# Altium PCB IR2104(7).PcbDoc
Units mm, origin at the board's own origin, x right, y up, seen from the top; angles counter-clockwise.
Board outline 152.4 x 101.6 mm, 2 copper layers (Top Layer, Bottom Layer); 28 components, 22 nets, 88 pads, 42 vias.
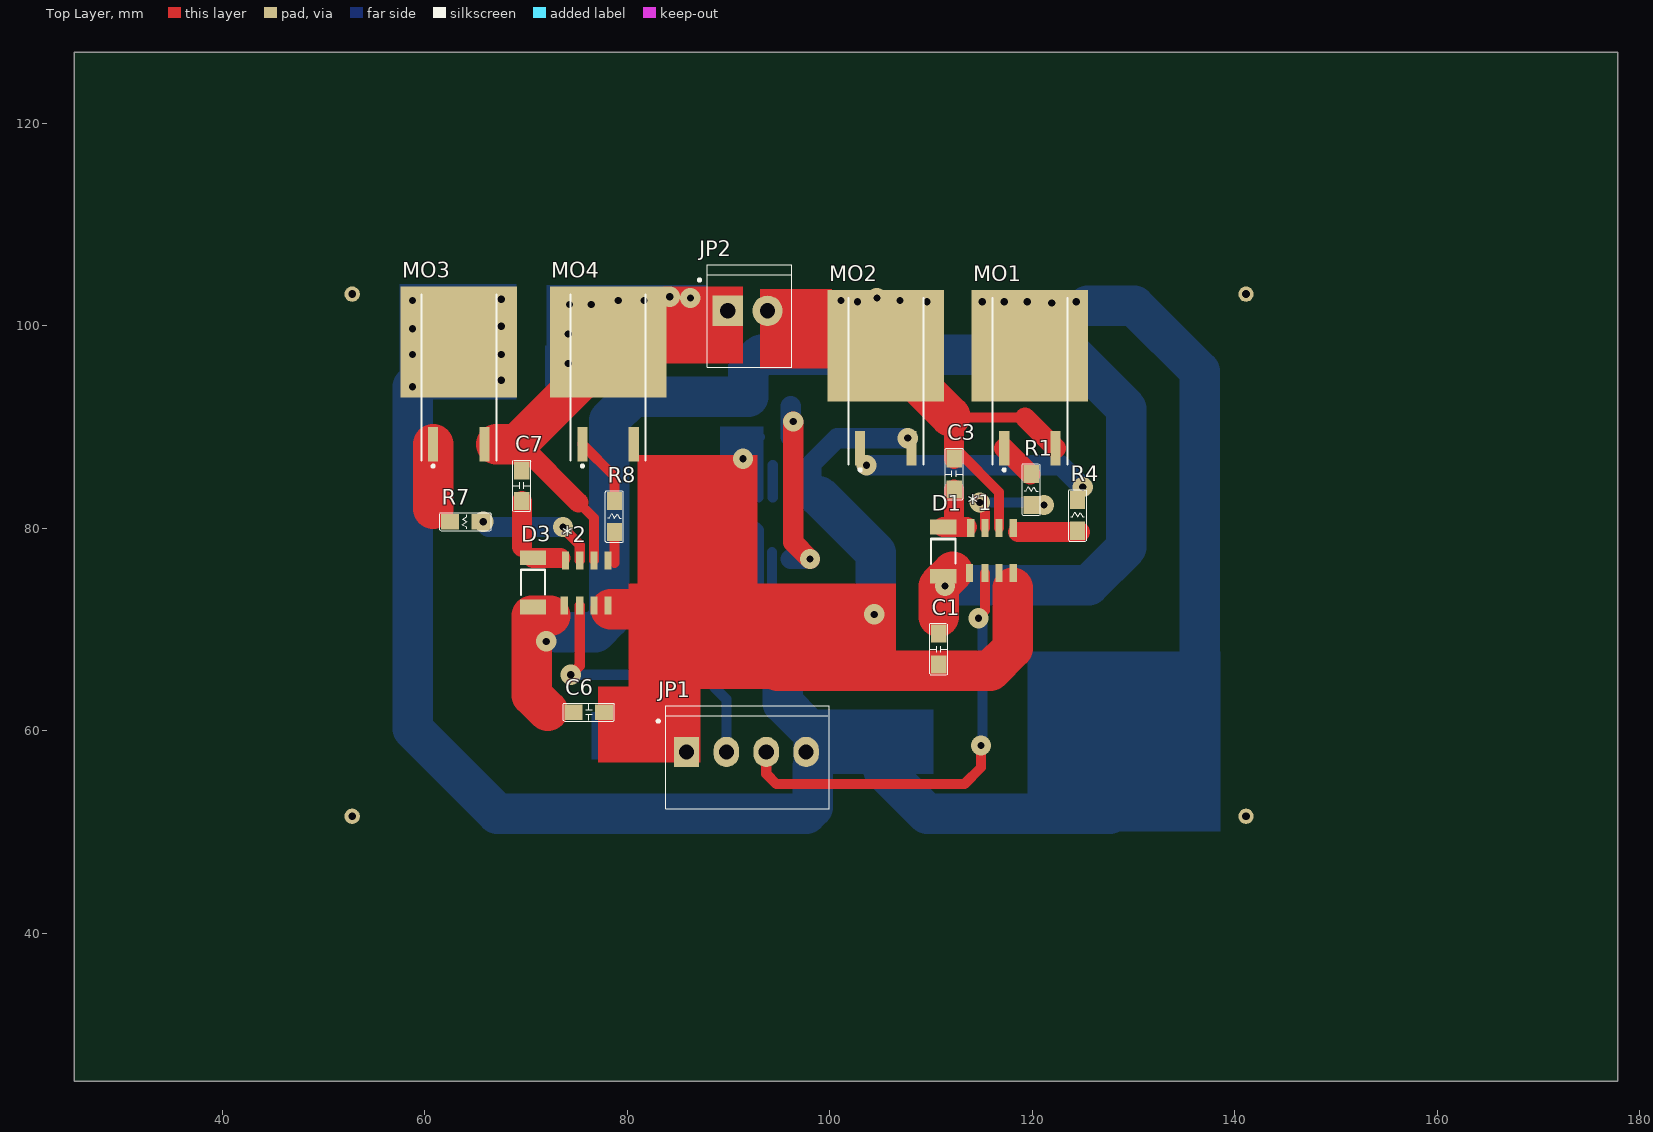
[diagram p0: Top Layer view]
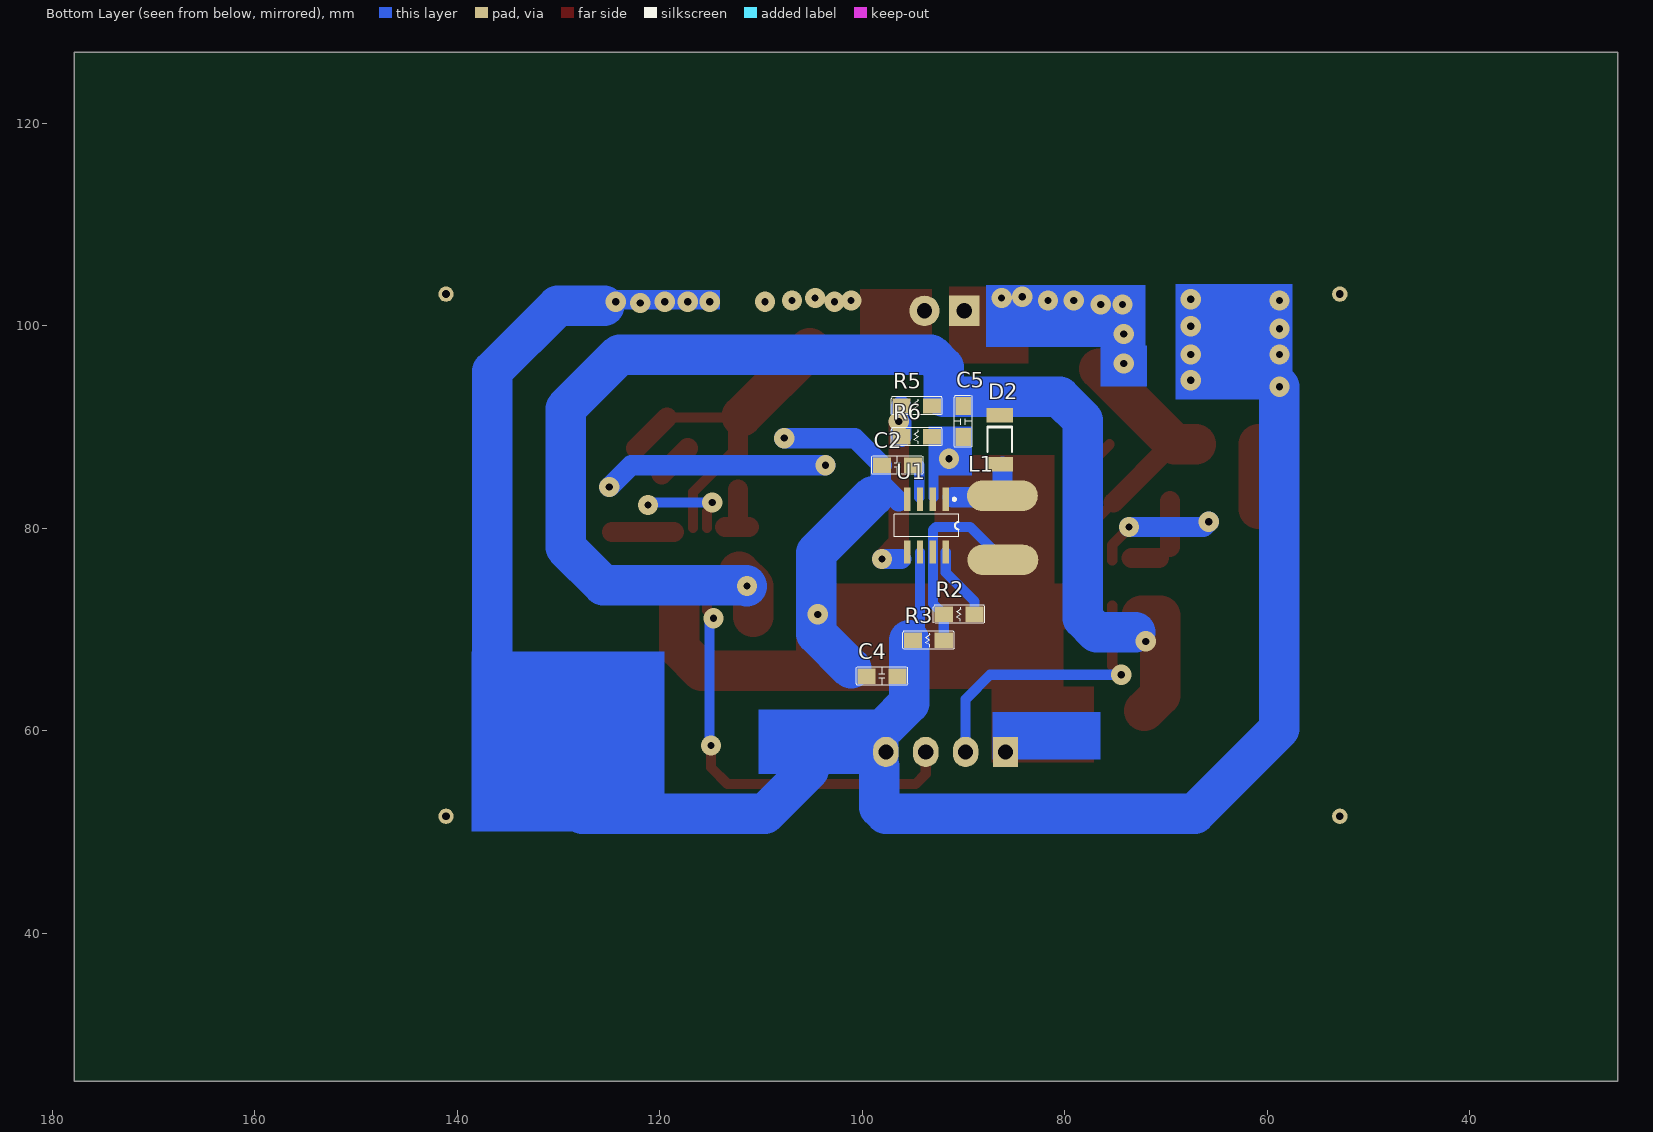
[diagram p1: Bottom Layer view, seen from below]

## Layer stack, top to bottom
Top Layer: signal copper 0.0356
Dielectric: dielectric 0.32, FR-4, Dk 4.8
Bottom Layer: signal copper 0.0356

## Board outline
25.4,25.4 177.8,25.4 177.8,127 25.4,127

## Design rules (kind name [scope] priority, off if disabled: settings)
Clearance [All] p1: gap=0.254
PolygonConnect [All] p1: connectstyle=Relief reliefconductorwidth=0.254 reliefentries=4 polygonreliefangle="90 Angle"
RoutingVias [All] p1: holewidth=0.711 width=1.27 viastyle="Through Hole" minholewidth=0.711 minwidth=1.27 maxholewidth=0.711 maxwidth=1.27
ShortCircuit [All] p1 off: allowed=FALSE
SilkToSilkClearance [All] p1 off: silktosilkclearance=0.254
SilkscreenOverComponentPads [All] p1 off: minsilkscreentomaskgap=0.254
SolderMaskExpansion [All] p1: expansion=0.102
TestPointUsage [All] p1: valid=0 allowmultiple=FALSE
Testpoint [All] p1: side=15 testpointundercomponent=TRUE minsize=1.016 maxsize=2.54 preferedsize=1.524 minholesize=0 maxholesize=1.016 preferedholesize=0.813 testpointgrid=0.025 style=1023 order=0-112345678
Width [All] p1: maxlimit=4 minlimit=1 preferedwidth=2
21 further rules are at their usual default settings.

## Components (designator, comment, footprint, x,y, rotation, side; value= is the part's Value field where it differs from the comment)
*1 "IR2103" IR2104S 117.348,77.851 r0 top
*2 "IR2103" IR2104S 77.343,74.676 r0 top
C1 "CAP_1" CC1005-0402 110.744,66.548 r90 top
C2 "CAP_1" CC1005-0402 98.044,86.233 r180 bottom
C3 "CAP_1" CC1005-0402 112.268,86.868 r270 top
C4 "CAP_1" CC1005-0402 99.568,65.405 r180 bottom
C5 "CAP_1" CC1005-0402 90.043,89.027 r90 bottom
C6 "CAP_1" CC1005-0402 77.724,61.849 r180 top
C7 "CAP_1" CC1005-0402 69.596,85.725 r270 top
D1 "DIODE" "diode stan" 111.252,77.724 r90 top
D2 "DIODE" "diode stan" 86.36,88.773 r90 bottom
D3 "DIODE" "diode stan" 70.739,74.676 r90 top
JP1 "H-4" "H-4/4 -T" 85.852,57.912 r90 top
JP2 "H-2" H-2/2-T 89.916,101.473 r90 top
L1 "10mH" 贴片电感 82.804,84.201 r0 bottom
MO1 "IRF2804" TS-005 119.888,98.044 r0 top
MO2 "IRF2804" TS-005 105.664,98.044 r0 top
MO3 "IRF2804" TS-005 63.5,98.425 r0 top
MO4 "IRF2804" TS-005 78.232,98.425 r0 top
R1 "Res" R2012-0805 119.888,82.296 r90 top
R2 "Res" R2012-0805 88.9,71.501 r0 bottom
R3 "Res" R2012-0805 91.948,68.961 r0 bottom
R4 "Res" R2012-0805 124.46,79.756 r90 top
R5 "Res" R2012-0805 93.091,92.075 r0 bottom
R6 "Res" R2012-0805 93.091,89.027 r0 bottom
R7 "Res" R2012-0805 65.532,80.645 r180 top
R8 "Res" R2012-0805 78.74,79.629 r90 top
U1 "MC34063A" SOP-8 93.661,80.264 r0 bottom

## Footprints (in the part's own frame and the unit in brackets; to place one, negate y for a bottom-side part, rotate by r counter-clockwise, add the part's x,y. Pads: shape width x height; smd on the part's side, far side on the other; paste and mask are expansions set on the pad)
CC1005-0402 [mil]
  rect 70x60 smd: 1(0,0) 2(120,0)
  silkscreen extent -40,-35 160,35
"diode stan" [mm]
  rect 1.45x2.6 smd: 1(-2.45,0.051) 2(2.4,0.051)
  silkscreen extent -1.24,-1.15 1.27,1.25, body extent -2.51,-1.24 2.44,1.35, height 1.27
H-2/2-T [mm]
  rect 3x3 hole 1.5 unplated: 1(0,0)
  round 3 hole 1.5 unplated: 2(0,-3.937)
  silkscreen extent -5.59,-6.35 4.57,2.92
"H-4/4 -T" [mm]
  rect 3x2.5 hole 1.5 unplated: 1(0,0)
  oval 3x2.5 hole 1.5 unplated: 2(0,-3.937) 3(0,-7.874) 4(0,-11.811)
  silkscreen extent -5.59,-14.1 4.57,2.92
IR2104S [mil]
  rect 28x70 smd: 1(-140,-90) 2(-80,-90) 3(-25,-90) 4(30,-90) 5(30,85) 6(-25,85) 7(-80,85) 8(-135,85)
R2012-0805 [mil]
  rect 70x60 smd: 1(0,0) 2(120,0)
  silkscreen extent -40,-35 160,35
SOP-8 [mm]
  rect 0.635x2.286 smd: 1(-1.905,-2.6) 2(-0.635,-2.6) 3(0.635,-2.6) 4(1.905,-2.6) 5(1.905,2.6) 6(0.635,2.6) 7(-0.635,2.6) 8(-1.905,2.6)
  silkscreen extent -3.17,-2.72 3.17,1.1
TS-005 [mm]
  rect 1x3.4 smd: 1(-2.667,-10.13) 2(2.413,-10.13)
  rect 11.5x11 smd: 3(-0.127,-0.03)
  silkscreen extent -3.83,-12.4 3.57,4.67
贴片电感 [mm]
  oval 7x3 smd: 1(3.353,0.991) 2(3.302,7.315)
  body extent -0.33,0.44 6.76,7.54, height 1.27

## Part data
C1 C2 C3 C4 C5 C6 C7: "Capacitor"
JP1: "Header, 4-Pin"
JP2: "Header, 2-Pin"
L1: library part INDUCTOR
R1 R2 R3 R4 R5 R6 R7 R8: "Resistor"

## Free pads (board coordinates)
  round 1.524 hole 0.762: 0(141.097,51.562) 1(52.832,51.562) 2(141.097,103.124) 3(52.832,103.124) 4(52.832,103.124) 5(52.832,51.562) 6(141.097,51.562) 7(141.097,103.124)

## Via types
v1: diameter 2, hole 0.711, Top Layer to Bottom Layer, 42 vias

## Nets (pads, with @x,y where several pads share a name; then routed paths per layer and width w, separated by ;. In a path a pad name is that pad's centre, name@x,y a point inside that pad or via, vN(x,y) a via of type N, cw(c..) or ccw(c..) an arc to the next point about the centre after c; other vN are vias at no path point)
GND: *1.3 *1.4 *2.3 *2.4 C1.1 C2.1 C4.1 C5.1 C6.1 JP1.1 MO2.2 MO4.2 R6.1 U1.2 U1.4 | length 87.6
  Top Layer w4: *2.4@78.359,72.009 91.44,72.009 ; 94.869,65.913 110.744,65.913 115.824,65.913 118.07,68.159 118.07,74.128
  Bottom Layer w1: C5.1 R6.1 R6.1@92.845,88.781 ; U1.2@92.964,83.037 R6.1@92.964,88.773
  Bottom Layer w2: 96.393,82.677 97.79,84.074 ; C2.1 100.711,88.9 v1(107.696,88.9) ; 98.171,84.328 C2.1@98.171,86.106
  Bottom Layer w4: 98.933,83.185 104.521,77.597 104.521,69.596 101.092,66.167
  other v1: 104.394,71.501 91.44,86.868
Net*1_5: *1.5 R4.1 | length 6.1
  Top Layer w2: 118.618,79.629 R4.1@124.714,79.629
Net*1_7: *1.7 R1.1 | length 8.6
  Top Layer w1: v1@114.554,82.423 115.316,81.661 *1.7
  Bottom Layer w1: v1(114.808,82.55) v1@120.65,82.55
  other v1: 121.158,82.296
Net*1_8: *1.8 C3.2 D1.2 | length 5
  Top Layer w2: D1.2 113.525,80.124 ; 112.268,81.19 C3.2
Net*2_5: *2.5 R8.1 | length 3
  Top Layer w1: 78.74,76.581 R8.1
Net*2_7: *2.7 R7.1 | length 12.1
  Top Layer w1: v1@73.533,80.137 75.311,78.359 *2.7
  Bottom Layer w2: v1(65.786,80.645) 66.294,80.137 v1(73.66,80.137)
Net*2_8: *2.8 C7.2 D3.2 | length 7.2
  Top Layer w2: 69.596,78.168 C7.2 ; D3.2 73.393,77.076
NetC2_2: C2.2 U1.3 | length 3.2
  Bottom Layer w1: U1.3@94.361,83.056 C2.2@94.361,86.233
NetD2_1: D2.1 L1.1 U1.1 | length 8.1
  Bottom Layer w2: L1.1@85.806,83.058 91.059,83.058 ; L1.1 D2.1@86.157,86.069
NetL1_2: L1.2 R2.2 R3.1 U1.7 | length 19.7
  Bottom Layer w1: L1.2 89.357,80.137 92.71,80.137 93.026,79.821 U1.7 93.026,72.579 R2.2 R3.1
NetMO1_1: MO1.1 R1.2 | length 3.6
  Top Layer w2: MO1.1 R1.2@119.791,85.344
NetMO2_1: MO2.1 R4.2 | length 22.2
  Bottom Layer w2: v1(103.632,86.233) 122.809,86.233 v1(124.968,84.074)
NetMO3_1: MO3.1 R7.2 | length 6.4
  Top Layer w4: 60.833,81.915 MO3.1
NetMO4_1: MO4.1 R8.2 | length 6.9
  Top Layer w1: MO4.1 78.74,85.12 R8.2
NetR2_1: R2.1 U1.8 | length 7.3
  Bottom Layer w1: R2.1 88.9,72.771 91.756,75.627 U1.8
NetR5_2: R5.2 R6.2 U1.5 | length 19.2
  Top Layer w2: v1(96.393,90.551) 96.393,78.613 v1(98.044,76.962)
  Bottom Layer w2: 96.139,76.962 v1(98.044,76.962) ; R6.2 R5.2
O1: *1.2 JP1.3 | length 42.9
  Top Layer w1: JP1.3 93.726,55.753 94.742,54.737 113.284,54.737 114.935,56.388 v1(114.935,58.547) ; v1@115.316,71.882 *1.2
  Bottom Layer w1: v1@115.062,58.547 v1@115.062,71.12
  other v1: 114.681,71.12
O2: *2.2 JP1.2 | length 28.8
  Top Layer w1: v1(74.422,65.532) 75.311,66.421 *2.2
  Bottom Layer w1: v1(74.422,65.532) 87.376,65.532 89.789,63.119 JP1.2
OUT1: *1.6 C3.1 JP2.2 MO1.2 MO2.3 | length 34.5
  Top Layer w1: 112.268,91.283 112.619,90.932 119.283,90.932 ; C3.1@112.776,87.503 116.713,83.566 *1.6
  Top Layer w2: C3.1 112.268,91.283 ; 119.283,90.932 MO1.2
  Top Layer w4: MO2.3@105.156,97.79 111.887,91.059
  other v1: 102.743,102.362 109.601,102.362 101.092,102.489 106.934,102.489 104.648,102.743
OUT2: *2.6 C7.1 JP2.1 MO3.2 MO4.3 | length 27.4
  Top Layer w1: 75.184,82.545 76.708,81.021 *2.6
  Top Layer w2: 69.118,88.295 69.434,88.295 75.184,82.545
  Top Layer w4: 67.056,88.295 69.118,88.295 MO4.3@76.581,95.758
  other v1: 74.168,96.266 74.168,99.187 74.295,102.108 76.454,102.108 79.121,102.489 81.661,102.489 86.233,102.743 84.201,102.87
VCC: C4.2 JP1.4 MO1.3 MO3.3 R3.2 U1.6 | length 183.8
  Bottom Layer w1: R3.2@94.296,69.661 U1.6
  Bottom Layer w4: v1(58.801,93.98) 58.801,60.198 67.183,51.816 97.663,51.816 98.298,52.451 98.298,56.515 ; R3.2@95.377,68.961 95.377,62.738 97.663,60.452 ; 105.283,56.134 109.601,51.816 127.635,51.816 136.525,60.706 136.525,95.504 130.048,101.981 125.476,101.981
  other v1: 67.564,94.615 58.801,97.155 67.564,97.155 58.801,99.695 67.564,99.949 121.92,102.235 115.062,102.362 117.221,102.362 119.507,102.362 124.333,102.362 58.801,102.489 67.564,102.616
VOUT: *1.1 *2.1 C1.2 C5.2 C6.2 D1.1 D2.2 D3.1 R5.1 | length 133.1
  Top Layer w4: 72.136,61.976 70.593,63.519 70.593,67.71 70.593,71.374 72.39,71.374 ; 110.744,71.247 110.744,74.295 D1.1@112.141,75.692
  Bottom Layer w4: 73.025,69.723 76.835,69.723 78.232,71.12 78.232,90.678 80.518,92.964 91.948,92.964 91.948,95.885 93.218,97.155 123.952,97.155 129.286,91.821 129.286,78.105 125.555,74.374 111.458,74.374 v1(111.379,74.295)
  other v1: 72.009,68.834

## Other copper
Top Layer:
  rectangle net GND: 77.089,56.896 87.249,64.389
  rectangle net GND: 81.026,72.898 92.837,87.249
  rectangle net GND: 80.137,64.135 106.553,74.549
  rectangle net OUT1: 93.091,95.758 100.203,103.632
  rectangle net OUT2: 83.566,96.266 91.44,103.886
Bottom Layer:
  rectangle net VCC: 119.507,50.038 138.557,67.818
  rectangle net VCC: 114.046,101.6 125.476,103.505
  rectangle net VCC: 57.531,92.71 69.088,104.14
  rectangle net GND: 89.154,85.217 93.472,90.043
  rectangle net GND: 76.454,57.15 87.122,61.849
  rectangle net VCC: 96.393,55.753 110.236,62.103
  rectangle net OUT2: 72.009,97.917 87.757,104.013
  rectangle net OUT2: 71.882,93.98 76.454,98.044